# Allegro board FULL_CIRCUIT2.brd
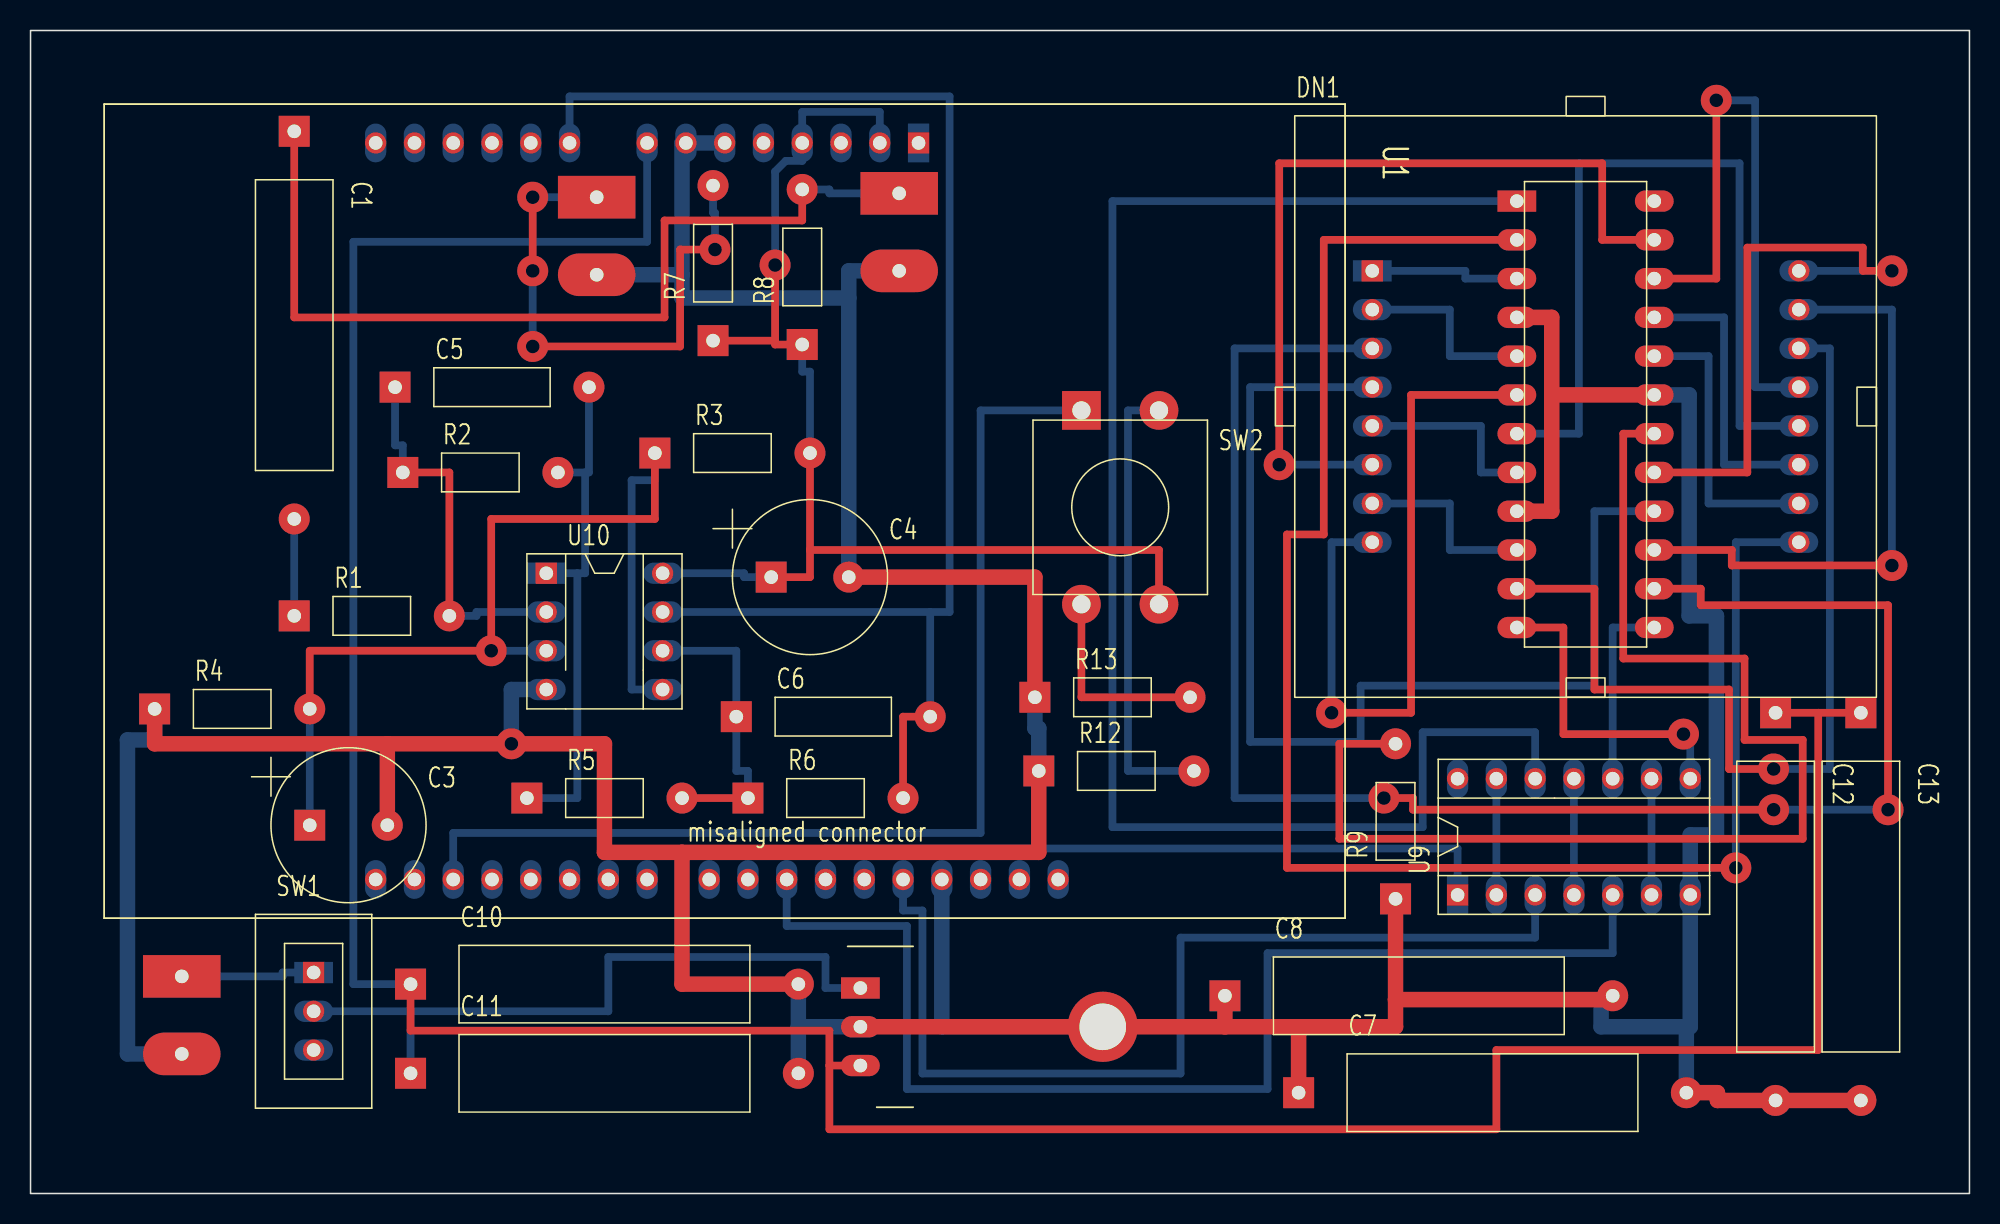
[diagram p0: board, top side]
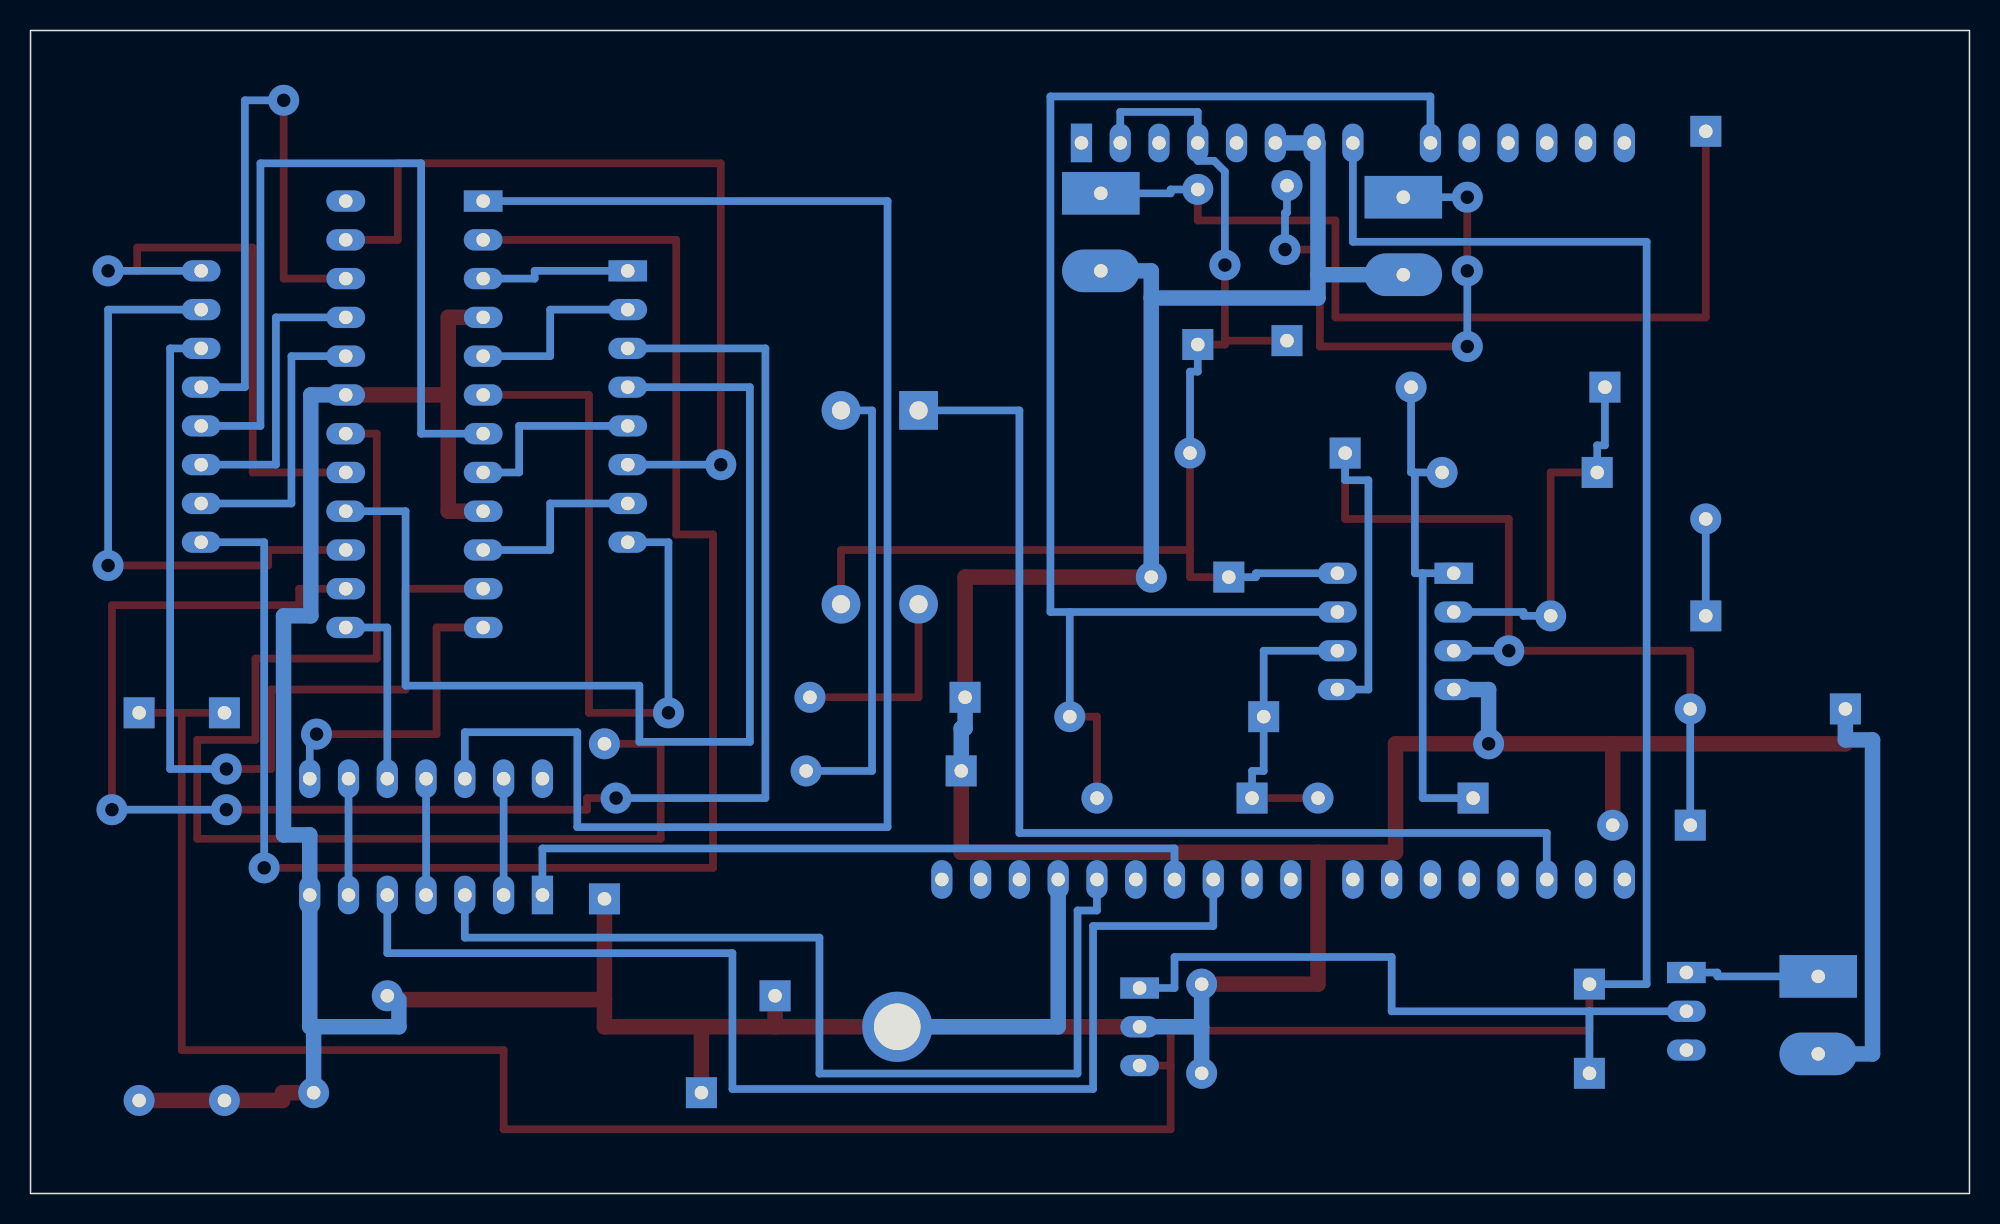
[diagram p1: board, bottom side, seen from below]

Outline 127 x 76.2 mm; copper layers: TOP, BOTTOM. Coordinates in mm from the lower left corner of the outline.
Outline path: rectangle 0,0 127,76.2

## Design rules (mm)
constraint set DEFAULT: min track width 0.508
nets with their own width: min track width 1.016; nets GND

## Placement (name value [footprint] x y rotation side)
C1  1u  [GU-RC1000]  17.27 69.6 270 top
C3  220U  [GU-CAPCYL200]  18.29 24.13 0 top
C4  220U  [GU-CAPCYL200]  48.51 40.39 0 top
C5  1n  [GU-RC500]  23.88 52.83 0 top
C6  1n  [GU-RC500]  46.23 31.24 0 top
C7  1n  [GU-RC1000]  83.06 6.6 0 top
C8  1n  [GU-RC1000]  78.23 12.95 0 top
C10  220u  [GU-RC1000]  24.89 13.72 0 top
C11  0.1u  [GU-RC1000]  24.89 7.87 0 top
C12  0.1u  [GU-RC1000]  114.3 31.5 270 top
C13  10u  [GU-RC1000]  119.89 31.5 270 top
DN1  LedArr-8x8  [GU-DIPLONG16-1100]  87.88 60.45 0 top
J1  BATTERY 9V  [GU-TERMINAL2-200]  9.91 14.22 0 top
J2  LED  [GU-TERMINAL2-200]  37.08 65.28 0 top
J3  PhotoDiode  [GU-TERMINAL2-200]  56.9 65.53 0 top
R1  10k  [GU-RC400]  17.27 37.85 0 top
R2  50k  [GU-RC400]  24.38 47.24 0 top
R3  100k  [GU-RC400]  40.89 48.51 0 top
R4  100k  [GU-RC400]  8.13 31.75 0 top
R5  1k  [GU-RC400]  32.51 25.91 0 top
R6  50k  [GU-RC400]  46.99 25.91 0 top
R7  100  [GU-RC400]  44.7 55.88 90 top
R8  10k  [GU-RC400]  50.55 55.63 90 top
R9  1k  [GU-RC400]  89.41 19.3 90 top
R12  1k  [GU-RC400]  66.04 27.69 0 top
R13  1k  [GU-RC400]  65.79 32.51 0 top
SW1  SW_SL_SPDT  [GU-SW-SLIDE-SPDT]  18.54 14.48 0 top
SW2  SW PUSHBUTTON-SPST-2/SM  [GU-PUSH52]  68.83 51.31 0 top
U1  FRDM-KL25Z-Arduino  [GU-FRDM-ARDUINO]  58.17 68.83 270 top
U5  LM2937  [GU-LM2937]  54.36 13.46 0 top
U8  MAX7221  [GU-DIP24]  101.85 51.05 0 top
U9  74HCT04  [GU-DIPSOCK14]  93.47 19.56 90 top
U10  MCP6292  [GU-DIPSOCK8]  33.78 40.64 0 top

## Library data of the parts
C1 C5-C8 = C
C3 C4 = C_elect_0
C10-C13 = CAPACITOR NON-POL
DN1 = LedArr-8x8
J1-J3 = CON2: User Part Number: TERMINAL2-200
R1-R9 R12 R13 = R
SW1 = SW_SL_SPDT
SW2 = SW PUSHBUTTON-SPST-2/SM
U1 = FRDM-KL25Z-Arduino
U5 = LM2937_0
U8 = MAX7221_5
U9 = 74HCT04
U10 = MCP6292

## Footprints (pads in the part's own frame, mm; a bottom-side part is the same pattern mirrored in y, then rotated)
GU-CAPCYL200
  rect 2.032x2.032 hole 0.889: 1(0,0)
  round 2.032 hole 0.889: 2(5.08,0)
GU-DIP24
  rect 2.54x1.397 hole 0.889: 1(-4.5,13.97)
  oval 2.54x1.397 hole 0.889: 2(-4.5,11.43) 3(-4.5,8.89) 4(-4.5,6.35) 5(-4.5,3.81) 6(-4.5,1.27) 7(-4.5,-1.27) 8(-4.5,-3.81) 9(-4.5,-6.35) 10(-4.5,-8.89) 11(-4.5,-11.43) 12(-4.5,-13.97) 13(4.5,-13.97) 14(4.5,-11.43) 15(4.5,-8.89) 16(4.5,-6.35) 17(4.5,-3.81) 18(4.5,-1.27) 19(4.5,1.27) 20(4.5,3.81) 21(4.5,6.35) 22(4.5,8.89) 23(4.5,11.43) 24(4.5,13.97)
GU-DIPLONG16-1100
  rect 1.397x1.397 hole 0.889: 1(0,0)
  round 1.397 hole 0.889: 2(0,-2.54) 3(0,-5.08) 4(0,-7.62) 5(0,-10.16) 6(0,-12.7) 7(0,-15.24) 8(0,-17.78) 9(27.94,-17.78) 10(27.94,-15.24) 11(27.94,-12.7) 12(27.94,-10.16) 13(27.94,-7.62) 14(27.94,-5.08) 15(27.94,-2.54) 16(27.94,0)
GU-DIPSOCK8
  rect 1.397x1.397 hole 0.889: 1(0,0)
  round 1.397 hole 0.889: 2(0,-2.54) 3(0,-5.08) 4(0,-7.62) 5(7.62,-7.62) 6(7.62,-5.08) 7(7.62,-2.54) 8(7.62,0)
GU-DIPSOCK14
  rect 1.397x1.397 hole 0.889: 1(0,0)
  round 1.397 hole 0.889: 2(0,-2.54) 3(0,-5.08) 4(0,-7.62) 5(0,-10.16) 6(0,-12.7) 7(0,-15.24) 8(7.62,-15.24) 9(7.62,-12.7) 10(7.62,-10.16) 11(7.62,-7.62) 12(7.62,-5.08) 13(7.62,-2.54) 14(7.62,0)
GU-FRDM-ARDUINO
  rect 1.397x1.397 hole 0.889: 1(0,0)
  round 1.397 hole 0.889: 2(0,-2.54) 3(0,-5.08) 4(0,-7.62) 5(0,-10.16) 6(0,-12.7) 7(0,-15.24) 8(0,-17.78) 9(0,-22.86) 10(0,-25.4) 11(0,-27.94) 12(0,-30.48) 13(0,-33.02) 14(0,-35.56) 15(48.26,-35.56) 16(48.26,-33.02) 17(48.26,-30.48) 18(48.26,-27.94) 19(48.26,-25.4) 20(48.26,-22.86) 21(48.26,-20.32) 22(48.26,-17.78) 23(48.26,-13.716) 24(48.26,-11.176) 25(48.26,-8.636) 26(48.26,-6.096) 27(48.26,-3.556) 28(48.26,-1.016) 29(48.26,1.524) 30(48.26,4.064) 31(48.26,6.604) 32(48.26,9.144)
GU-LM2937
  rect 2.54x1.397 hole 0.889: 1(0,0)
  oval 2.54x1.397 hole 0.889: 2(0,-2.54) 3(0,-5.08)
  round 4.6 hole 3.05: 4(15.875,-2.54)
GU-PUSH52
  rect 2.54x2.54 hole 1.194: 1(0,0)
  round 2.54 hole 1.194: 2(5.08,0) 3(0,-12.7) 4(5.08,-12.7)
GU-RC400
  rect 2.032x2.032 hole 0.889: 1(0,0)
  round 2.032 hole 0.889: 2(10.16,0)
GU-RC500
  rect 2.032x2.032 hole 0.889: 1(0,0)
  round 2.032 hole 0.889: 2(12.7,0)
GU-RC1000
  rect 2.032x2.032 hole 0.889: 1(0,0)
  round 2.032 hole 0.889: 2(25.4,0)
GU-SW-SLIDE-SPDT
  rect 1.397x1.397 hole 0.889: 1(0,0)
  round 1.397 hole 0.889: 2(0,-2.54) 3(0,-5.08)
GU-TERMINAL2-200
  rect 5.08x2.794 hole 0.889: 1(0,0)
  oval 5.08x2.794 hole 0.889: 2(0,-5.08)

## Nets
GND: C3.2(-) C4.2(-) C7.1 C7.2 C8.1 C8.2 C10.2 C11.2 C12.2 C13.2 J1.2 J2.2 J3.2 R4.1 R9.1 R12.1 R13.1 U1.6 U1.7 U1.29 U5.2 U5.4 U8.4 U8.9 U8.19(VCC) U9.7 U10.4
VCC: U9.14
N03961: C4.1 R3.2 R7.1 R8.1 SW2.4 U1.2 U1.4 U10.8
N04053: C3.1 R3.1 R4.2 U10.3 U10.5
N08137: C5.1 R1.2 R2.1 U10.2
N08145: C5.2 R2.2 R5.1 U10.1
N08157: C6.1 R5.2 R6.1 U10.6
N08161: C6.2 R6.2 U1.9 U10.7(OUT)
N08433: C1.2 R1.1
N08614: C1.1 J3.1 R8.2
N10280: J2.1 R7.2
N11771: R9.2 U8.18
N11778: U8.13 U9.10
N11791: U8.12 U9.8
N13184: U9.4 U9.11
N13188: U9.2 U9.13
N13195: U9.6 U9.9
N13202: U8.1 U9.12(Y)
N13214: U1.26 U9.1
N13218: U1.28 U9.3
N13222: U1.25 U9.5
N22090: C11.1 SW1.2 U5.1
N22979: C10.1 C12.1 C13.1 U1.8 U5.3(OUT)
N25169: DN1.16 U8.17
N25451: DN1.13 U8.22
N25464: DN1.3 U8.14
N25471: DN1.4 U8.16
N25478: DN1.10 U8.20
N25485: DN1.6 U8.23
N25492: DN1.11 U8.21
N25499: DN1.15 U8.15
N28309: J1.1 SW1.1
N29244: SW2.1 U1.17
N29260: R12.2 SW2.2
N29264: R13.2 SW2.3
N32702: DN1.9 U8.2
N32704: DN1.14 U8.11
N32706: DN1.8 U8.6
N32708: DN1.12 U8.7
N32710: DN1.1 U8.3
N32712: DN1.7 U8.10
N32714: DN1.2 U8.5
N32716: DN1.5(RA8) U8.8

Pads without a net: SW1 3; U1 1 3 5 10 11 12 13 14 15 16 18 19 20 21 22 23 24 27 30 31 32; U8 24

## Via types
v1: diameter 2.032, hole 0.889, TOP to BOTTOM, 18 vias

## Routing (per net, layer and track width the routed paths; a pad name or vN(x,y) marks a point on that pad's centre or on a via; arc(x,y) is an arc through that point)
GND: length 394.4
  TOP w1.016: 99.64,52.32 U8.19 ; 99.64,52.32 99.64,44.7 U8.9 ; 99.64,52.32 99.64,57.4 U8.4 ; C4.2 65.79,40.39 R13.1 ; 23.37,29.46 v1(31.5,29.46) 37.59,29.46 37.59,22.35 42.67,22.35 ; 23.37,29.46 C3.2 ; 23.37,29.46 8.13,29.46 R4.1 ; C7.1 83.06,10.92 ; 83.06,10.92 78.23,10.92 ; 83.06,10.92 89.41,10.92 89.41,12.7 ; R9.1 89.41,12.7 ; 89.41,12.7 102.87,12.7 ; U5.2 U5.4 78.23,10.92 ; 42.67,22.35 66.04,22.35 R12.1 ; 42.67,22.35 42.67,13.72 C10.2 ; C13.2 C12.2 110.49,6.1 110.49,6.6 C7.2 ; 78.23,10.92 C8.1
  BOTTOM w1.016: 50.29,10.92 U5.2 ; 50.29,10.92 C10.2 ; 50.29,10.92 C11.2 ; v1(31.5,29.46) 31.5,33.02 U10.4 ; R4.1 8.13,29.72 6.35,29.72 6.35,9.14 J1.2 ; 102.87,12.7 102.87,10.92 108.46,10.92 ; U5.4 59.69,10.92 U1.29 ; J3.2 53.59,60.45 53.59,58.67 ; U1.6 U1.7 42.67,68.83 42.67,60.2 ; 42.67,60.2 42.67,58.67 53.59,58.67 ; 42.67,60.2 J2.2 ; 53.59,58.67 C4.2 ; 108.46,10.92 C7.2 ; 108.46,10.92 108.71,10.92 U9.7 108.71,23.5 110.43,23.5 110.43,37.85 108.64,37.85 108.64,52.32 U8.19 ; R13.1 65.79,30.48 66.04,30.48 R12.1
N03961: length 81.6
  TOP w0.508: 48.77,55.88 48.77,55.63 R8.1 ; 48.77,55.88 R7.1 ; 48.77,55.88 v1(48.77,60.83) ; 51.05,42.16 73.91,42.16 SW2.4 ; 51.05,42.16 51.05,40.39 C4.1 ; 51.05,42.16 R3.2
  BOTTOM w0.508: R3.2 51.05,53.85 50.55,53.85 R8.1 ; v1(48.77,60.83) 48.77,66.96 49.47,67.66 50.55,67.66 U1.4 50.55,70.87 55.63,70.87 U1.2 ; C4.1 46.74,40.39 46.74,40.64 U10.8
N04053: length 69.6
  TOP w0.508: R4.2 18.29,35.56 v1(30.18,35.56) 30.18,44.2 40.89,44.2 R3.1
  BOTTOM w0.508: U10.5 39.37,33.02 39.37,46.74 40.89,46.74 R3.1 ; C3.1 R4.2 ; U10.3 v1(30.18,35.56)
N08137: length 25.1
  TOP w0.508: R2.1 27.43,47.24 R1.2
  BOTTOM w0.508: R2.1 24.38,49.02 23.88,49.02 C5.1 ; R1.2 29.21,37.85 29.21,38.1 U10.2
N08145: length 34.8
  BOTTOM w0.508: U10.1 35.81,40.64 ; 35.81,40.64 36.32,40.64 36.32,47.24 ; 35.81,40.64 35.81,25.91 R5.1 ; 36.32,47.24 36.58,47.24 C5.2 ; 36.32,47.24 R2.2
N08157: length 19.6
  TOP w0.508: R5.2 R6.1
  BOTTOM w0.508: U10.6 46.23,35.56 C6.1 46.23,27.69 46.99,27.69 R6.1
N08161: length 94.5
  TOP w0.508: R6.2 57.15,31.24 C6.2
  BOTTOM w0.508: U1.9 35.31,71.88 60.2,71.88 60.2,38.1 58.93,38.1 ; 58.93,38.1 C6.2 ; 58.93,38.1 U10.7
N08433: length 6.3
  BOTTOM w0.508: R1.1 C1.2
N08614: length 60.5
  TOP w0.508: R8.2 50.55,63.75 41.53,63.75 41.53,57.4 17.27,57.4 C1.1
  BOTTOM w0.508: R8.2 52.32,65.79 52.32,65.53 J3.1
N10280: length 36.6
  TOP w0.508: v1(32.89,60.45) v1(32.89,65.28) ; v1(44.83,61.85) 42.55,61.85 42.55,55.5 v1(32.89,55.5)
  BOTTOM w0.508: v1(32.89,55.5) v1(32.89,60.45) ; R7.2 44.7,64.26 44.83,64.26 v1(44.83,61.85) ; J2.1 v1(32.89,65.28)
N11771: length 80.6
  TOP w0.508: U8.18 104.32,49.78 104.32,35.05 112.27,35.05 112.27,29.72 116.08,29.72 116.08,23.24 85.73,23.24 85.73,29.46 R9.2
N11778: length 12.6
  BOTTOM w0.508: U9.10 103.63,37.08 U8.13
N11791: length 21.3
  TOP w0.508: v1(108.27,30.1) 100.4,30.1 100.4,37.08 U8.12
  BOTTOM w0.508: v1(108.27,30.1) 108.71,30.1 U9.8
N13184: length 7.6
  BOTTOM w0.508: U9.11 U9.4
N13188: length 7.6
  BOTTOM w0.508: U9.13 U9.2
N13195: length 7.6
  BOTTOM w0.508: U9.9 U9.6
N13202: length 104.5
  BOTTOM w0.508: U9.12 98.55,30.23 91.19,30.23 91.19,24 70.87,24 70.87,65.02 U8.1
N13214: length 46.5
  BOTTOM w0.508: U1.26 52.07,22.61 93.47,22.61 U9.1
N13218: length 65.8
  BOTTOM w0.508: U9.3 98.55,16.76 75.32,16.76 75.32,7.86 58.42,7.86 58.42,18.54 57.15,18.54 U1.28
N13222: length 80.5
  BOTTOM w0.508: U1.25 49.53,17.53 57.4,17.53 57.4,6.84 81.03,6.84 81.03,15.75 103.63,15.75 U9.5
N22090: length 45.5
  BOTTOM w0.508: C11.1 24.89,11.94 ; 24.89,11.94 SW1.2 ; 24.89,11.94 37.85,11.94 37.85,15.49 52.07,15.49 52.07,13.46 U5.1
N22979: length 214.7
  TOP w0.508: 52.32,8.38 52.32,4.21 96.01,4.21 96.01,9.4 117.09,9.4 117.09,31.5 ; 52.32,8.38 U5.3 ; 52.32,8.38 52.32,10.67 24.89,10.67 C10.1 ; 117.09,31.5 C13.1 ; 117.09,31.5 C12.1
  BOTTOM w0.508: C10.1 21.15,13.72 21.15,62.36 40.39,62.36 U1.8
N25169: length 37.9
  TOP w0.508: v1(121.92,60.45) 120.02,60.45 120.02,61.98 112.45,61.98 112.45,47.24 U8.17
  BOTTOM w0.508: DN1.16 v1(121.92,60.45)
N25451: length 39.9
  TOP w0.508: U8.22 110.42,59.94 v1(110.42,71.63)
  BOTTOM w0.508: v1(110.42,71.63) 112.96,71.63 112.96,52.83 DN1.13
N25464: length 111.8
  TOP w0.508: v1(88.65,25.91) 90.55,25.91 90.55,25.15 v1(114.17,25.15) ; U8.14 109.4,39.62 109.4,38.54 121.67,38.54 v1(121.67,25.15)
  BOTTOM w0.508: v1(114.17,25.15) v1(121.67,25.15) ; v1(88.65,25.91) 78.87,25.91 78.87,55.37 DN1.3
N25471: length 72.8
  BOTTOM w0.508: U8.16 102.43,44.7 102.43,33.27 87.12,33.27 87.12,29.59 79.88,29.59 79.88,52.83 DN1.4
N25478: length 19.1
  BOTTOM w0.508: U8.20 109.91,54.86 109.91,45.21 DN1.10
N25485: length 55.4
  TOP w0.508: v1(81.79,47.75) 81.79,67.5 102.94,67.5 102.94,62.48 U8.23
  BOTTOM w0.508: DN1.6 v1(81.79,47.75)
N25492: length 19.1
  BOTTOM w0.508: DN1.11 110.93,47.75 110.93,57.4 U8.21
N25499: length 39.4
  TOP w0.508: U8.15 111.43,42.16 111.43,41.15 v1(121.92,41.15)
  BOTTOM w0.508: v1(121.92,41.15) 121.92,57.91 DN1.15
N28309: length 8.9
  BOTTOM w0.508: SW1.1 16.51,14.48 16.51,14.22 J1.1
N29244: length 71.9
  BOTTOM w0.508: U1.17 27.69,23.62 62.23,23.62 62.23,51.31 SW2.1
N29260: length 30
  BOTTOM w0.508: SW2.2 71.88,51.31 71.88,27.69 R12.2
N29264: length 13.2
  TOP w0.508: R13.2 68.83,32.51 SW2.3
N32702: length 111.1
  TOP w0.508: U8.2 84.71,62.48 84.71,43.18 82.3,43.18 82.3,21.34 v1(111.7,21.34)
  BOTTOM w0.508: DN1.9 111.7,42.67 v1(111.7,21.34)
N32704: length 61.9
  TOP w0.508: U8.11 102.43,39.62 102.43,33.02 111.25,33.02 111.25,27.81 v1(114.17,27.81)
  BOTTOM w0.508: v1(114.17,27.81) 117.86,27.81 117.86,55.37 DN1.14
N32706: length 46.8
  TOP w0.508: v1(85.22,31.5) 90.42,31.5 90.42,52.32 U8.6
  BOTTOM w0.508: DN1.8 85.22,42.67 v1(85.22,31.5)
N32708: length 53.4
  BOTTOM w0.508: U8.7 101.42,49.78 101.42,67.5 111.94,67.5 111.94,50.29 DN1.12
N32710: length 10
  BOTTOM w0.508: U8.3 93.98,59.94 93.98,60.45 DN1.1
N32712: length 12.5
  BOTTOM w0.508: U8.10 92.96,42.16 92.96,45.21 DN1.7
N32714: length 12.5
  BOTTOM w0.508: DN1.2 92.96,57.91 92.96,54.86 U8.5
N32716: length 12.5
  BOTTOM w0.508: U8.8 95,47.24 95,50.29 DN1.5
